# Allegro board CN0565 Test Board Allegro Project.brd
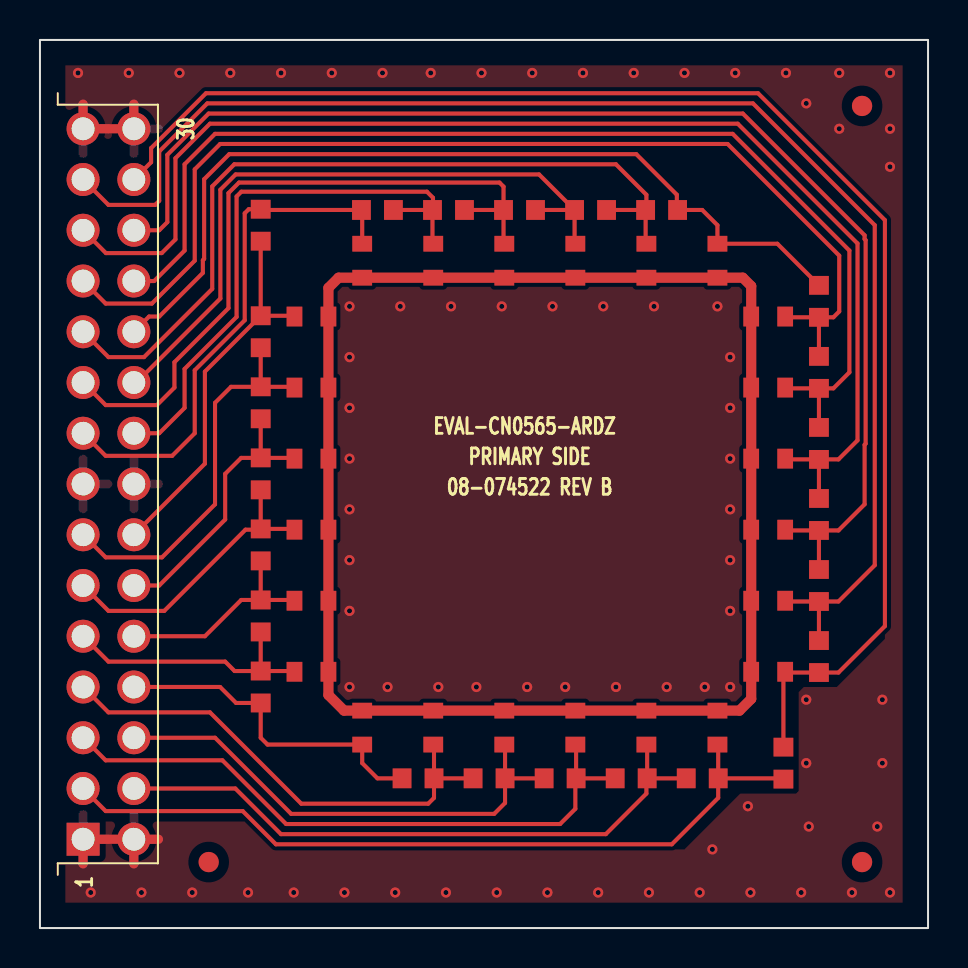
[diagram p0: board, top side]
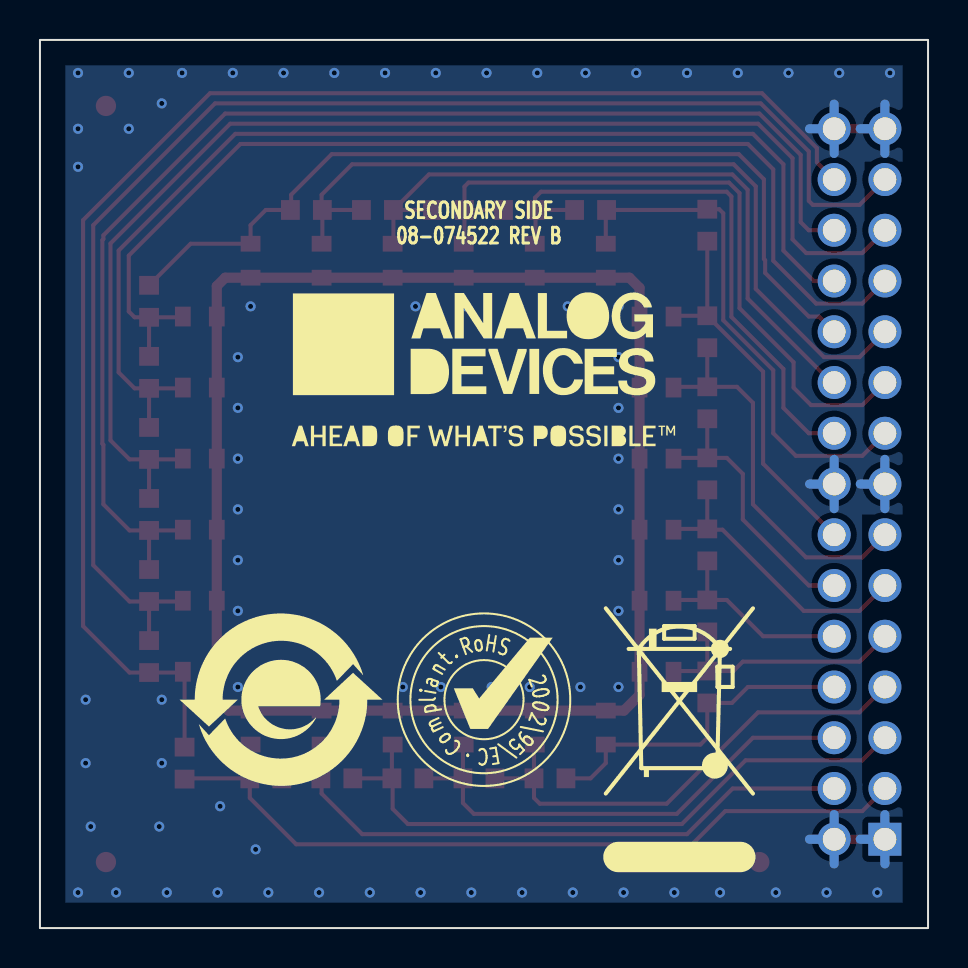
[diagram p1: board, bottom side, seen from below]

Outline 44.45 x 44.45 mm; copper layers: TOP, BOTTOM. Coordinates in mm from the lower left corner of the outline.
Outline path: rectangle 0,0 44.45,44.45

## Design rules (mm)
constraint set DEFAULT: min track width 0.203

## Placement (name value [footprint] x y rotation side)
C29  10pF  [C0603]  37.21 8.25 270 top
C33  470pF  [C0603]  33.15 7.49 180 top
C36  10pF  [C0603]  38.99 13.59 270 top
C37  10pF  [C0603]  29.59 7.49 0 top
C38  10pF  [C0603]  38.99 17.14 270 top
C39  1NF  [C0603]  26.03 7.49 180 top
C40  10NF  [C0603]  38.99 20.7 90 top
C41  10pF  [C0603]  22.48 7.49 0 top
C42  10pF  [C0603]  38.99 24.26 270 top
C43  10pF  [C0603]  18.92 7.49 0 top
C44  10pF  [C0603]  38.99 27.81 270 top
C45  10pF  [C0603]  11.05 12.06 270 top
C46  10pF  [C0603]  38.99 31.37 270 top
C47  150pF  [C0603]  11.05 15.62 90 top
C48  680pF  [C0603]  31.11 35.94 180 top
C49  10pF  [C0603]  11.05 19.18 270 top
C50  10pF  [C0603]  27.56 35.94 0 top
C51  10pF  [C0603]  11.05 22.73 270 top
C52  47NF  [C0603]  24 35.94 180 top
C53  10pF  [C0603]  11.05 26.29 270 top
C54  10pF  [C0603]  20.45 35.94 0 top
C55  220pF  [C0603]  11.05 29.84 90 top
C56  10pF  [C0603]  16.89 35.94 0 top
C57  10pF  [C0603]  11.05 35.18 270 top
NOREF  -  []  128.27 38.1 0 top
NOREF#2  -  [unnamed#2]  8.44 3.3 0 top
NOREF#3  -  []  1.27 1.27 0 top
NOREF#4  -  []  2.16 4.44 0 top
NOREF#5  -  []  44.45 0 0 top
NOREF#6  -  []  2.16 4.44 0 top
NOREF#7  -  [unnamed#2]  41.15 3.3 0 top
NOREF#8  -  []  -76.2 197.48 0 top
NOREF#9  -  []  -114.3 -128.91 0 top
NOREF#10  -  []  0 0 0 top
NOREF#11  -  []  0 44.45 0 top
NOREF#12  -  []  0 44.45 270 top
NOREF#13  -  []  -114.3 -128.91 0 top
NOREF#14  -  [unnamed#2]  41.15 41.15 0 top
NOREF#15  -  []  266.06 332.11 0 top
NOREF#16  -  []  44.45 44.45 180 top
NOREF#17  -  []  0 0 0 top
NOREF#18  -  []  44.45 0 90 top
NOREF#19  -  []  0 44.45 0 top
NOREF#20  -  []  44.45 0 90 top
NOREF#21  -  []  -114.3 -128.91 0 top
NOREF#22  -  []  -114.3 -128.91 0 top
NOREF#23  -  []  0 0 0 top
NOREF#24  -  []  22.23 11.43 180 bottom
NOREF#25  -  []  32.38 11.43 180 bottom
NOREF#26  -  []  3.17 19.69 180 bottom
NOREF#27  -  []  22.23 27.94 180 bottom
P2  SSW-115-02-T-D-RA  [CNSAMTEC-SSW-115-02-T-D-RA]  2.16 4.44 90 top
R1  49.9K  [R0603]  33.91 10.03 90 top
R2  4.99K  [R0603]  36.45 12.83 0 top
R3  49.9K  [R0603]  30.35 10.03 90 top
R4  4.99K  [R0603]  36.45 16.38 0 top
R5  49.9K  [R0603]  26.8 10.03 90 top
R6  49.9K  [R0603]  36.45 19.94 0 top
R7  49.9K  [R0603]  23.24 10.03 90 top
R8  49.9K  [R0603]  36.45 23.49 0 top
R9  49.9K  [R0603]  19.68 10.03 90 top
R10  10K  [R0603]  36.45 27.05 0 top
R11  49.9K  [R0603]  16.13 10.03 90 top
R12  10K  [R0603]  36.45 30.61 0 top
R13  49.9K  [R0603]  13.59 12.83 0 top
R14  49.9K  [R0603]  33.91 33.4 90 top
R15  49.9K  [R0603]  13.59 16.38 0 top
R16  49.9K  [R0603]  30.35 33.4 90 top
R17  100K  [R0603]  13.59 19.94 0 top
R18  49.9K  [R0603]  26.8 33.4 90 top
R21  100K  [R0603]  13.59 23.49 0 top
R22  49.9K  [R0603]  23.24 33.4 90 top
R23  49.9K  [R0603]  13.59 27.05 0 top
R24  20K  [R0603]  19.68 33.4 90 top
R25  49.9K  [R0603]  13.59 30.61 0 top
R26  20K  [R0603]  16.13 33.4 90 top

## Library data of the parts
C29 C36-C38 C41-C46 C49-C51 C53 C54 C56 C57 = CAP: User Part Number: UPN; Tolerance: 5; alternate symbols: (C0603L); part number: CAP_SM-10PF,50V,5,E031564,C0603; tolerance: 5
C33 = CAP: User Part Number: UPN; Tolerance: 5; alternate symbols: (C0603L); part number: CAP_SM-470PF,50V,5,E000429,C0603; tolerance: 5
C39 = CAP: User Part Number: UPN; Tolerance: 10; alternate symbols: (C0603L); part number: CAP_SM-1NF,100V,10,E042847,C0603; tolerance: 10
C40 = CAP: User Part Number: UPN; Tolerance: 10; alternate symbols: (C0603L); part number: CAP_SM-10NF,16V,10,E042810,C0603; tolerance: 10
C47 = CAP: User Part Number: UPN; Tolerance: 5; alternate symbols: (C0603L); part number: CAP_SM-150PF,50V,5,E000416,C0603; tolerance: 5
C48 = CAP: User Part Number: UPN; Tolerance: 5; alternate symbols: (C0603L); part number: CAP_SM-680PF,50V,5,E000431,C0603; tolerance: 5
C52 = CAP: User Part Number: UPN; Tolerance: 10; alternate symbols: (C0603L); part number: CAP_SM-47NF,100V,10,E044215,C0603; tolerance: 10
C55 = CAP: User Part Number: UPN; Tolerance: 5; alternate symbols: (C0603L); part number: CAP_SM-220PF,50V,5,E000417,C0603; tolerance: 5
P2 = CN30P_ODD_EVEN_V2: User Part Number: UPN; Tolerance: N/A; alternate symbols: (); part number: CN30P_ODD_EVEN_V2_TH-SSW-115-02-T-D-RA,E023089,CNSAMTEC-SSW-115-02-T-D-RA; tolerance: N/A
R1 R3 R5-R9 R11 R13-R16 R18 R22 R23 R25 = RES: User Part Number: UPN; Tolerance: 1; alternate symbols: (R0603L); part number: RES_SM-49.9K,E015342,1/10W,1,R0603; tolerance: 1
R2 R4 = RES: User Part Number: UPN; Tolerance: 1; alternate symbols: (R0603L); part number: RES_SM-4.99K,E003726,1/10W,1,R0603; tolerance: 1
R10 R12 = RES: User Part Number: UPN; Tolerance: 1; alternate symbols: (R0603L); part number: RES_SM-10K,E003671,1/10W,1,R0603; tolerance: 1
R17 R21 = RES: User Part Number: UPN; Tolerance: 1; alternate symbols: (R0603L); part number: RES_SM-100K,E010279,1/10W,1,R0603; tolerance: 1
R24 R26 = RES: User Part Number: UPN; Tolerance: 5; alternate symbols: (R0603L); part number: RES_SM-20K,E003851,1/10W,5,R0603; tolerance: 5

## Footprints (pads in the part's own frame, mm; a bottom-side part is the same pattern mirrored in y, then rotated)
C0603
  rect 0.94x0.991 smd: 1(-0.8,0) 2(0.8,0)
CNSAMTEC-SSW-115-02-T-D-RA
  rect 1.651x1.651 hole 1.143: 1(0,0)
  round 1.651 hole 1.143: 2(0,-2.54) 3(2.54,0) 4(2.54,-2.54) 5(5.08,0) 6(5.08,-2.54) 7(7.62,0) 8(7.62,-2.54) 9(10.16,0) 10(10.16,-2.54) 11(12.7,0) 12(12.7,-2.54) 13(15.24,0) 14(15.24,-2.54) 15(17.78,0) 16(17.78,-2.54) 17(20.32,0) 18(20.32,-2.54) 19(22.86,0) 20(22.86,-2.54) 21(25.4,0) 22(25.4,-2.54) 23(27.94,0) 24(27.94,-2.54) 25(30.48,0) 26(30.48,-2.54) 27(33.02,0) 28(33.02,-2.54) 29(35.56,0) 30(35.56,-2.54)
R0603
  rect 0.787x0.991 smd: 1(-0.85,0) 2(0.85,0)
unnamed#2
  round 1.016 smd: (0,0)

## Nets
AGND: P2.1 P2.2 P2.15 P2.16 P2.29 P2.30
E0: C29.2(N2) C33.1 P2.3 R1.1
E1: C33.2(N2) C37.2(N2) P2.4 R3.1
E2: C37.1 C39.1 P2.5 R5.1
E3: C39.2(N2) C41.2(N2) P2.6 R7.1
E4: C41.1 C43.2(N2) P2.7 R9.1
E5: C43.1 C45.2(N2) P2.8 R11.1
E6: C45.1 C47.1 P2.9 R13.1
E7: C47.2(N2) C49.2(N2) P2.10 R15.1
E8: C49.1 C51.2(N2) P2.11 R17.1
E9: C51.1 C53.2(N2) P2.12 R21.1
E10: C53.1 C55.1 P2.13 R23.1
E11: C55.2(N2) C57.2(N2) P2.14 R25.1
E12: C56.1 C57.1 P2.17 R26.2(N2)
E13: C54.1 C56.2(N2) P2.18(N9) R24.2(N2)
E14: C52.2(N2) C54.2(N2) P2.19 R22.2(N2)
E15: C50.1 C52.1 P2.20 R18.2(N2)
E16: C48.2(N2) C50.2(N2) P2.21 R16.2(N2)
E17: C46.1 C48.1 P2.22 R14.2(N2)
E18: C44.1 C46.2(N2) P2.23 R12.2(N2)
E19: C42.1 C44.2(N2) P2.24 R10.2(N2)
E20: C40.2(N2) C42.2(N2) P2.25 R8.2(N2)
E21: C38.1 C40.1 P2.26 R6.2(N2)
E22: C36.1 C38.2(N2) P2.27 R4.2(N2)
E23: C29.1 C36.2(N2) P2.28 R2.2(N2)
UNNAMED_2_RES_I13_N2: R1.2(N2) R2.1 R3.2(N2) R4.1 R5.2(N2) R6.1 R7.2(N2) R8.1 R9.2(N2) R10.1 R11.2(N2) R12.1 R13.2(N2) R14.1 R15.2(N2) R16.1 R17.2(N2) R18.1 R21.2(N2) R22.1 R23.2(N2) R24.1 R25.2(N2) R26.1

## Via types
v1: diameter 0.508, hole 0.254, TOP to BOTTOM, 76 vias

## Routing (per net, layer and track width the routed paths; a pad name or vN(x,y) marks a point on that pad's centre or on a via; arc(x,y) is an arc through that point)
AGND: length 33.3
  TOP w0.457: 3.47,40 P2.30 4.7,41.24 ; 4.7,3.21 P2.2 ; P2.2 5.93,4.44 ; P2.2 3.47,4.44 ; 2.16,3.21 P2.1 3.39,4.44 ; 2.16,41.24 P2.29 3.39,40
  BOTTOM w0.457: 2.16,3.21 P2.1 ; P2.1 2.16,5.68 ; P2.1 3.39,4.44 ; P2.30 4.7,41.24 ; P2.30 5.93,40 ; P2.30 4.7,38.77 ; P2.15 3.39,22.22 ; P2.15 2.16,23.46 ; P2.15 2.16,20.99 ; 2.16,38.77 P2.29 ; P2.29 3.39,40 ; P2.29 2.16,41.24 ; 4.7,20.99 P2.16 ; P2.16 5.93,22.22 ; P2.16 4.7,23.46 ; P2.2 5.93,4.44 ; P2.2 4.7,5.68 ; P2.2 4.7,3.21
  vias: v1(1.9,42.8) v1(2.54,1.78) v1(4.44,42.8) v1(5.08,1.78) v1(6.98,42.8) v1(7.62,1.78) v1(9.52,42.8) v1(10.41,1.78) v1(12.07,42.8) v1(12.7,1.78) v1(14.61,42.8) v1(15.24,1.78) v1(15.49,31.11) v1(15.49,28.57) v1(15.49,26.03) v1(15.49,23.49) v1(15.49,20.95) v1(15.49,18.41) v1(15.49,15.87) v1(15.49,12.06) v1(17.14,42.8) v1(17.4,12.06) v1(17.78,1.78) v1(18.03,31.11) v1(19.56,42.8) v1(19.94,12.06) v1(20.32,1.78) v1(20.57,31.11) v1(21.84,12.06) v1(22.1,42.8) v1(22.86,1.78) v1(23.11,31.11) v1(24.38,12.06) v1(24.64,42.8) v1(25.4,1.78) v1(25.65,31.11) v1(26.29,12.06) v1(27.18,42.8) v1(27.94,1.78) v1(28.19,31.11) v1(28.83,12.06) v1(29.72,42.8) v1(30.48,1.78) v1(30.73,31.11) v1(31.37,12.06) v1(32.26,42.8) v1(33.02,1.78) v1(33.27,12.06) v1(33.65,3.94) v1(33.91,31.11) v1(34.54,28.57) v1(34.54,26.03) v1(34.54,23.49) v1(34.54,20.95) v1(34.54,18.41) v1(34.54,15.87) v1(34.54,12.06) v1(34.8,42.8) v1(35.43,6.1) v1(35.56,1.78) v1(37.34,42.8) v1(38.1,1.78) v1(38.35,41.27) v1(38.35,11.43) v1(38.35,8.25) v1(38.48,5.08) v1(40.01,42.8) v1(40.01,40) v1(40.64,1.78) v1(41.91,5.08) v1(42.16,11.43) v1(42.16,8.25) v1(42.55,42.8) v1(42.55,40) v1(42.54,38.1) v1(42.55,1.78)
E0: length 39.9
  TOP w0.203: R1.1 33.95,9.14 C33.1 ; C29.2 37.17,7.49 C33.1 ; C33.1 33.95,6.51 31.62,4.19 11.81,4.19 10.15,5.85 3.29,5.85 P2.3
E1: length 31.9
  TOP w0.203: C37.2 30.39,9.14 R3.1 ; C37.2 C33.2 ; C37.2 30.35,7.45 30.35,6.73 28.32,4.7 12.06,4.7 9.78,6.98 P2.4
E2: length 31.9
  TOP w0.203: C37.1 C39.1 ; C39.1 26.83,9.14 R5.1 ; C39.1 26.8,7.45 26.8,5.97 26.03,5.21 12.32,5.21 9.13,8.39 3.29,8.39 P2.5
E3: length 25.3
  TOP w0.203: C41.2 23.28,9.14 R7.1 ; C41.2 23.28,6.26 22.73,5.71 12.57,5.71 8.76,9.52 P2.6 ; C41.2 C39.2
E4: length 24.7
  TOP w0.203: P2.7 3.43,10.79 8.51,10.79 13.08,6.22 19.43,6.22 19.72,6.51 C43.2 ; C43.2 19.72,9.14 R9.1 ; C43.2 C41.1
E5: length 16.9
  TOP w0.203: P2.8 9.02,12.06 9.82,11.26 C45.2 11.05,9.52 11.39,9.18 R11.1 16.13,8.25 16.89,7.49 C43.1
E6: length 13.3
  TOP w0.203: C47.1 C45.1 ; C45.1 9.74,12.86 9.27,13.33 3.43,13.33 P2.9 ; C45.1 12.7,12.86 R13.1
E7: length 10.8
  TOP w0.203: C47.2 10.07,16.42 8.25,14.6 P2.10 ; C47.2 12.7,16.42 R15.1 ; C47.2 C49.2
E8: length 14.8
  TOP w0.203: C49.1 11.01,19.94 10.29,19.94 6.22,15.87 3.43,15.87 P2.11 ; C49.1 C51.2 ; C49.1 12.7,19.98 R17.1
E9: length 14
  TOP w0.203: C53.2 C51.1 ; C51.1 12.7,23.53 R21.1 ; C51.1 10.07,23.53 9.27,22.73 9.27,20.45 5.97,17.14 P2.12
E10: length 19.5
  TOP w0.203: P2.13 3.29,18.55 6.11,18.55 8.76,21.21 8.76,26.29 9.56,27.09 C53.1 ; C53.1 12.7,27.09 R23.1 ; C53.1 C55.1
E11: length 19
  TOP w0.203: C55.2 C57.2 ; C55.2 12.7,30.64 R25.1 ; C55.2 8.25,27.85 8.25,23.24 P2.14
E12: length 26.2
  TOP w0.203: P2.17 3.29,23.63 6.62,23.63 7.75,24.76 7.75,27.92 10.25,30.42 10.25,35.78 10.45,35.98 C57.1 11.09,35.94 C56.1 16.13,35.9 R26.2
E13: length 29.1
  TOP w0.203: C54.1 19.67,35.97 19.67,36.55 19.37,36.85 10.08,36.85 9.84,36.62 9.84,30.59 7.24,27.98 7.24,26.03 5.97,24.76 P2.18 ; C54.1 19.65,34.29 R24.2 ; C54.1 C56.2
E14: length 35.2
  TOP w0.203: R22.2 23.2,34.29 C52.2 ; P2.19 3.29,26.17 5.85,26.17 6.73,27.05 6.73,28.32 9.44,31.03 9.44,36.79 9.96,37.31 23,37.31 23.2,37.11 C52.2 ; C54.2 C52.2
E15: length 34
  TOP w0.203: P2.20 4.83,27.3 9.03,31.51 9.03,36.95 9.79,37.72 24.98,37.72 C50.1 ; R18.2 26.76,34.29 C50.1 ; C50.1 C52.1
E16: length 40.8
  TOP w0.203: P2.21 3.43,28.57 5.21,28.57 8.62,31.99 8.62,37.12 9.73,38.23 28.83,38.23 30.35,36.7 30.35,35.98 C48.2 ; C48.2 30.31,34.29 R16.2 ; C48.2 C50.2
E17: length 44.4
  TOP w0.203: P2.22 5.46,30.61 5.97,30.61 8.15,32.79 8.15,33.43 8.22,33.49 8.22,37.48 9.47,38.73 29.84,38.73 31.88,36.7 31.88,35.98 C48.1 33.15,35.94 33.91,35.18 R14.2 36.91,34.25 C46.1
E18: length 54.2
  TOP w0.203: P2.23 3.29,31.25 5.6,31.25 7.75,33.4 7.75,37.97 9.02,39.24 34.42,39.24 40,33.65 40,30.86 39.71,30.57 C46.2 ; R12.2 37.34,30.57 C46.2 ; C46.2 C44.1
E19: length 55.4
  TOP w0.203: C44.2 39.71,27.01 40.51,27.81 40.51,33.91 34.67,39.75 8.76,39.75 7.24,38.23 7.24,33.91 5.71,32.38 P2.24 ; C44.2 C42.1 ; C44.2 37.34,27.01 R10.2
E20: length 62.6
  TOP w0.203: C40.2 C42.2 ; C42.2 37.34,23.46 R8.2 ; C42.2 39.97,23.46 40.92,24.41 40.92,34.26 34.92,40.26 8.51,40.26 6.78,38.53 6.78,34.47 6.1,33.78 3.3,33.78 P2.25
E21: length 63.5
  TOP w0.203: C40.1 39.97,19.9 41.27,21.21 41.27,24.19 41.33,24.24 41.33,34.43 41.27,34.48 41.27,34.67 35.18,40.77 8.44,40.77 6.38,38.7 6.38,35.33 5.97,34.92 P2.26 ; C40.1 37.34,19.9 R6.2 ; C40.1 C38.1
E22: length 70.5
  TOP w0.203: C38.2 39.97,16.34 41.78,18.16 41.78,35.18 35.69,41.27 8.38,41.27 5.97,38.87 5.97,36.4 5.77,36.19 3.43,36.19 P2.27 ; C38.2 C36.1 ; C38.2 37.34,16.34 R4.2
E23: length 72.5
  TOP w0.203: C29.1 37.21,12.74 R2.2 37.34,12.79 C36.2 39.97,12.79 42.29,15.11 42.29,35.43 35.94,41.78 8.31,41.78 5.56,39.04 5.56,38.33 P2.28
UNNAMED_2_RES_I13_N2: length 84.3
  TOP w0.508: R25.2 14.44,32.04 14.95,32.55 R26.1 R24.1 R22.1 R18.1 R16.1 R14.1 35.18,32.55 35.6,32.13 R12.1 R10.1 R8.1 R6.1 R4.1 R2.1 35.6,11.47 35.01,10.88 R1.2 R3.2 R5.2 R7.2 R9.2 R11.2 15.22,10.88 14.44,11.66 R13.2 R15.2 R17.2 R21.2 R23.2 R25.2

## Copper pours and planes (outline as drawn; the poured copper is in the pictures)
AGND on TOP: 14.1,32.77 14.1,10.41 35.56,10.41 35.56,32.77
AGND on TOP: 1.27,43.18 43.18,43.18 43.18,1.27 1.27,1.27 1.27,5.33 10.67,5.33 12.06,3.94 32.26,3.94 35.05,6.73 37.85,6.73 37.97,6.86 37.97,11.81 38.23,12.06 39.88,12.06 42.29,14.48 42.29,35.86 38.66,39.5 1.27,39.5
AGND on BOTTOM: 14.66,43.18 43.18,43.18 43.18,1.27 1.27,1.27 1.27,7.62 1.65,7.24 3.3,7.24 3.3,20.7 1.27,20.7 1.27,25.53 3.17,25.53 3.17,38.35 1.27,38.35 1.27,43.18 14.61,43.18 14.61,43.13

## Text on the board
Ref Des/Silkscreen Bottom: SECONDARY SIDE | 08-074522 REV B
User.Comments: 7.    R5 TO R8,R13,R15,R18,R22 FOOTPRINT ARE ALL DNI | 8.    C29,C36 TO C38,C41 TO C46,C49 TO C51,C53,C54,C56,C57 FOOTPRINT ARE ALL DNI | 6.    SMOOTHEN EDGES AND FREE FROM BURS AFTER DEPANELIZATION PROCESS. | 5.    BOARDS TO BE SHIPPED SINGULATED AFTER ASSEMBLY PROCESS.
Ref Des/Assembly Top: MATE ENTRY
Ref Des/Silkscreen Top: EVAL-CN0565-ARDZ | PRIMARY SIDE | 08-074522 REV B
PAGE_OUTLINE: B | ECR-115089 | 11JUL23 | M. SO
BODY_CENTER: FAB NOTES REVISION: 2ND NOVEMBER 2022 | 8.   IMPEDANCE REQUIREMENTS: IF NO STACKUP IS DEFINED, THE VENDOR IS ALLOWED TO ADJUST THE DIELECTRIC | 13.  PLATING SPECIFICATION: | 9.   FILLET OPTIONS TO ENHANCE RELIABILITY AT PAD JUNCTIONS WHERE SPACING PERMITS. | 10.  THIEVING: | 11.  LAYER TO LAYER REGISTRATION SHALL BE WITHIN 0.003 INCHES. | 12.  DRILL SIZES ARE FINISHED HOLE SIZES. ALL HOLES SHALL BE LOCATED WITHIN 0.005 INCHES DTP, | 14.  SURFACE FINISH: | 15.  SOLDERMASK: | 1.   DIMENSIONS ARE IN INCHES (EXCEPT WHERE NOTED). | ALL DOCUMENTS & SPECIFICATIONS REFERRED TO BELOW SHOULD BE THE LATEST REVISIONS. | 2.  BOARD MATERIAL:(USE CHECKED ITEMS) | 3.   ALL LAMINATES & BONDING MATERIALS SHOULD BE SELECTED FROM IPC-4101 OR IPC-4103,(TG>170 DEGC TD>300 DEGC) | 4.   REFER TO IPC-6010 SERIES, CLASS 2 FOR FABRICATION. | 5.   REFER TO LAMINATION DIAGRAM FOR OVERALL BOARD THICKNESS, TOLERANCE APPLIES AFTER ALL LAMINATION AND PLATING | 6.   BOW & TWIST NOT TO EXCEED 0.0075 INCHES (0.75%) PER LINEAR INCH AND SHOULD BE MEASURED PER IPC-TM-650, METHOD 2.4.22. | 7.   ACCEPTABILITY PER ADI SPECIFICATION TST00115. | 16.  APPLY SILKSCREEN TO BOTH SIDES USING A NON-CONDUCTIVE, EPOXY BASED INK PER ARTWORK. | ( ) FILLETS ALLOWED | (X) FILLETS NOT ALLOWED | (X) VENDOR MAY ADD THIEVING TO COMPENSATE FOR LOW COPPER DENSITY AREAS MAINTAINING A MINIMUM | ( ) VENDOR MAY NOT ADD THIEVING TO COMPENSATE FOR LOW COPPER DENSITY AREAS. | (X) LPI | ( ) OTHER_________ | COLOR | (X) GREEN | (X) WHITE | ( ) OTHER | HINDER PROPER SOLDER WICKING. BARREL RELIEF ON SOLDERMASK ALLOWED IN UNFILLED VIA IN PAD HOLES. | (X) REFER TO LAMINATION DIAGRAM FOR FINISHED COPPER WEIGHT/THICKNESS REQUIRMENTS | (X) IMMERSION GOLD (ENIG) 1.58-3.94 MICRO INCHES OVER 118-236 MICRO INCHES MIN. OF ELECTROLESS NICKEL PER IPC-4552 | ( ) OSP (ORGANIC SOLDERABILITY PRESERVATIVE) | ( ) IMMERSION SILVER | ( ) SOFT WIRE BONDABLE GOLD 30-50 MICRO INCHES OF SOFT WIRE | ( ) EDGE CONNECTOR FINGERS ARE TO BE PLATED WITH 100 MICRO-INCHES(.0001") OF LOW STRESS | THICKNESS & TRACE WIDTHS TO MEET THE IMPEDANCE REQUIREMENT. IF SPECIFIED, THE VENDOR MUST | TRACE WIDTH & SPACING THAT IMPACT THE REQUIREMENTS MUST HAVE WRITTEN APPROVAL FROM ADI. | MINIMUM BARREL PLATING OF 0.001 INCHES. PLATED HOLES SHALL NOT BE ROUGH OR IRREGULAR SO AS TO | SOLDERMASK OVER BARE COPPER OR BARE GOLD (BOTH SIDES) TO MEET IPC-SM-840. | IF PRESENT,DO NOT MODIFY SOLDERMASK DEFINED PADS (MASK OPENINGS LESS THAN COPPER PAD) WITHOUT APPROVAL. | MEET THE REQUIREMENTS LISTED IN THE IMPEDANCE TABLE. ANY ADJUSTMENT MADE TO THE DEFINED STACKUP, | PROCESSES. FINISHED THICKNESS MEASURED FROM TOP COPPER TO BOTTOM COPPER. | (X) ISOLA 370HR OR S1000-2 OR IT180 OR EQUIVALENT | ( ) ISOLA FR408HR OR EQUIVALENT | ( ) ISOLA IS410 | ( ) MEGTRON 6 | ( ) NELCO 4000-13 | ( ) ROGERS 4350B | ( ) ROGERS 3003 | ( ) ARLON 85N | ( ) EM370D | ( ) OTHER ________________________ | UL FLAMMABILITY RATING 94V-0. BOARD MATERIAL & CONSTRUCTION SHALL MEET THE REQUIREMENTS OF UL796/UL796F. | BONDABLE GOLD OVER 100-150 MICRO INCHES OF NICKEL | NICKEL UNDER 30 MICRO-INCHES (.0003') OF GOLD | 0.100 INCH CLEARANCE FROM ALL COPPER FEATURES, | THE STARTING COPPER WEIGHT/THICKNESS CAN VARY AS LONG AS THE FINISHED COPPER | WEIGHT/THICKNESS IS NOT LESS THAN THE SPECIFIED VALUE. | UNLESS OTHERWISE SPECIFIED | HOMOGENOUS MATERIALS IN THIS BOARD SHALL BE COMPLAINT WITH THE EU DIRECTIVE 2002/95/EC | WORKMANSHIP SHALL CONFORM TO IPC-A-600, CLASS 2. | 21.  INTENTIONAL SHORTS: | 17.  FINAL ELECTRICAL TEST TO BE PERFORMED USING PROVIDED IPC-D-356A NETLIST OR ODB++ FORMAT FILE. | 22.  PEMNUTS: | 23.  MANUFACTURER TO ETCH/STAMP WITH PERMANENT NON-CONDUCTIVE INK | ON SECONDARY SIDE UNLESS OTHERWISE SPECIFIED: | 18.  A TIME DOMAIN REFLECTOMETER REPORT (TDR) FOR EACH IMPEDANCE CONTROLLED LAYER & A CERTIFICATE | 19.  IF PRESENT, ALL BLIND/BURIED VIAS WITH AN ASPECT RATIO <1:1 TO BE PLATED SHUT WITH COPPER WHEN | 20.  FOR VIA FILL INFORMATION REFER TO DRILL CHART: | 25. PANELIZATION: | 27.  MINIMUM DESIGN LINE WIDTH IS 8 MILS. | 28.  MINIMUM DESIGN LINE SPACING IS 8 MILS. | IS ACCEPTABLE, ALL OTHER INSTANCES MUST BE REPORTED. | IF AN INTENTIONAL SHORT REPORT IS SUPPLIED AND DOES NOT MATCH THE FAB DATA THEN | THE PCB SHALL HAVE A VERIFICATION STAMP. | (X)  NON-CONDUCTIVE EPOXY FILL | ( )  COPPER FILL ALL | ( ) PEMNUTS TO BE INSTALLED BY FABRICATOR | ( ) PEMNUTS NOT TO BE INSTALLED BY FABRICATOR | (X) NOT APPLICABLE | USED AS VIA-IN-PAD OR AS A STACKED VIA. BLIND/BURIED VIAS WITH AN ASPECT RATIO >1:1 TO BE FILLED | A. UL CODE-FLAMMABILITY RATING FOR THOSE APPROVED MATERIALS(IF APPLICABLE) | B. DATE CODE | C. LOT NUMBER | D. MANUFACTURER LOGO | BOARDS TO BE SHIPPED IN ARRAY AND KEPT INTACT | PANEL TO BE SUBJECTED TO CUSTOMERS APPROVAL | PANEL SOLDER PASTE STENCIL GERBER TO BE PROVIDED TO ANALOG | CAN'T BE PERFORMED BECAUSE THE TRACE LENGTH IS TOO SHORT ON THE OUTER LAYERS AT THE PIN ESCAPES | ADI APPROVAL IS REQUIRED. | OF COMPLIANCE SHALL BE PROVIDED BY VENDOR AT TIME OF SHIPMENT. INSTANCES WHERE TDR TESTING | WITH NON-CONDUCTIVE EPOXY. | TOOLING: | FINISH: | NOTES: | MATERIAL: | TESTING: | MISCELLANEOUS: | 2 LAYER STACKUP
DIMENSION: DIA MAX/SEE NOTE 20 | (REF) | - | " "
User.45: FIGURE | SIZE | 10.0 | 45.0 | PLATED | FINISHED HOLES IN MILS | ALL UNITS ARE IN MILS | QTY | 76 | 30 | TOLERANCE/NOTES
